# Altium PCB Booster_Sensors.PcbDoc
Units mil, origin at the board's own origin, x right, y up, seen from the top; angles counter-clockwise.
Board outline 12795.28 x 354.33 mil, 2 copper layers (Top Layer, Bottom Layer); 16 components, 10 nets, 28 pads, 27 vias.
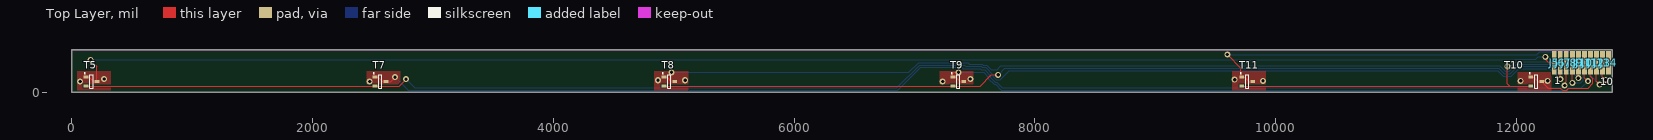
[diagram p0: Top Layer view]
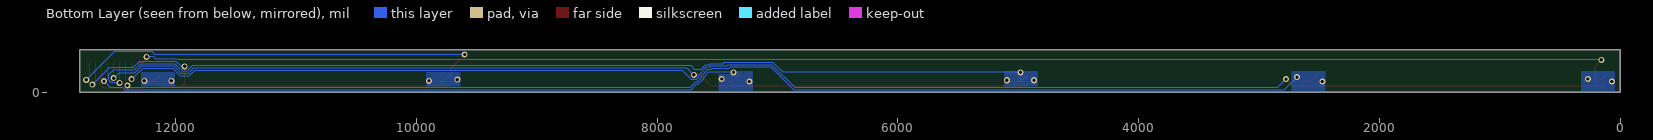
[diagram p1: Bottom Layer view, seen from below]
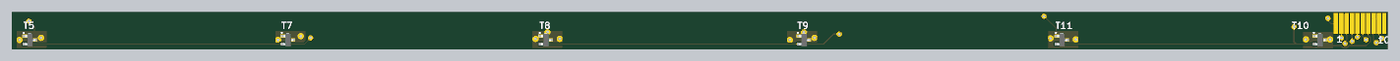
[diagram p2: 3D render of the assembled board from above, using the file's embedded part models]

## Layer stack, top to bottom
Top Solder: solder mask 0.4, Solder Resist, Dk 3.5
Top Layer: signal copper 1.4
Dielectric 1: dielectric 12.6, FR-4, Dk 4.8
Bottom Layer: signal copper 1.4
Bottom Solder: solder mask 0.4, Solder Resist, Dk 3.5

## Board outline
-0.28,0 -0.28,354.33 12795,354.33 12795,0

## Design rules (kind name [scope] priority, off if disabled: settings)
Clearance [All] p1: gap=10 ignorepadtopadclearanceinfootprint=FALSE except(0: Arc-Hole Track-Hole SMDPad-Hole THPad-Hole Via-Hole Fill-Hole Poly-Hole Region-Hole Text-Hole)
PolygonConnect [All] p1: connectstyle=Direct reliefconductorwidth=10 reliefentries=4 polygonreliefangle="90 Angle" airgapwidth=10
RoomDefinition Sensors [InComponentClass('Sensors')] p1: confinementstyle=ConfineIn formatcopy=TRUE lockcomponents=FALSE outline 11930,-45 12780,-45 12780,490 11930,490
RoutingVias [All] p1: holewidth=28 width=50 viastyle="Through Hole" minholewidth=28 minwidth=50 maxholewidth=28 maxwidth=50
SolderMaskExpansion [All] p1: expansion=4
Width [All] p1: maxlimit=10 minlimit=10 preferedwidth=10
30 further rules are at their usual default settings.

## Components (designator, comment, footprint, x,y, rotation, side; value= is the part's Value field where it differs from the comment)
J5 "SMD Pad" R700X200 12315,245 r270 top
J6 "SMD Pad" R700X200 12365,245 r270 top
J7 "SMD Pad" R700X200 12415,245 r270 top
J8 "SMD Pad" R700X200 12465,245 r270 top
J9 "SMD Pad" R700X200 12515,245 r270 top
J10 "SMD Pad" R700X200 12565,245 r270 top
J11 "SMD Pad" R700X200 12615,245 r270 top
J12 "SMD Pad" R700X200 12665,245 r270 top
J13 "SMD Pad" R700X200 12715,245 r270 top
J14 "SMD Pad" R700X200 12765,245 r270 top
T5 "BC847B" SOT95P230X110-3N 164.68,88.98 r0 top
T7 "BC847B" SOT95P230X110-3N 2564.68,88.98 r0 top
T8 "BC847B" SOT95P230X110-3N 4964.69,88.98 r0 top
T9 "BC847B" SOT95P230X110-3N 7364.69,88.98 r0 top
T10 "BC847B" SOT95P230X110-3N 12164.69,88.98 r0 top
T11 "BC847B" SOT95P230X110-3N 9764.69,88.98 r0 top

## Footprints (in the part's own frame and the unit in brackets; to place one, negate y for a bottom-side part, rotate by r counter-clockwise, add the part's x,y. Pads: shape width x height; smd on the part's side, far side on the other; paste and mask are expansions set on the pad)
R700X200 [mm] "7mm x  2mm SMD Pad"
  rect 5x1 smd paste-1: 1(0,0)
SOT95P230X110-3N [mm] "SOT23, 3 pin, Pitch 0.95mm - 1.3mm W X 2.9mm L X 1.1mm H, IPC Medium Density"
  rect 1x0.6 smd: 1(-1.15,0.95) 2(-1.15,-0.95) 3(1.15,0)
  silkscreen extent -1.52,-1.45 0.32,1.87, body extent -1.08,-1.5 1.25,1.5, height 1.1

## Part data
J5 J6 J7 J8 J9 J10 J11 J12 J13 J14: library part SMD_PAD_7X2MM, "Single SMD Pad", Author="CERN DEM MR", ComponentHeight=0mm, Component Type="Standard (No BOM)", CreateDate=09.09.2016, Family="SMD Pad", HelpURL=Undefined, LatestRevisionDate=09.09.2016, Mounted=No, PackageDescription="7mm x  2mm SMD Pad", Part Description="7mm x 2mm SMD Pad", Part Number=SMD_PAD_7X2MM, Pin Count=1, Sense=No, SMD=No, Socket=No, Status=None
T5 T7 T8 T9 T10 T11: "NPN Transistor", Case=SOT23-3, Manufacturer="NXP SEMICONDUCTORS", Author="CERN DEM JLC", Bonding=No, ComponentHeight=1.1mm, Component Type=Standard, CreateDate=14.06.2011, Device=BC847B, HelpURL=\\cern.ch\dfs\Applications\Altium\Datasheets\BC847B.pdf, LatestRevisionDate=14.06.2011, Manufacturer Part Number=BC847B, Mounted=Yes, PackageDescription="SOT23, 3 pin, Pitch 0.95mm - 1.3mm W X 2.9mm L X 1.1mm H, IPC Medium Density", Part Description="45V 100mA NPN general-purpose transistors", Part Number=BC847B, Pin Count=3, PressFit=No, Sense=No, SMD=Yes, Socket=No

## Via types
v1: diameter 50, hole 28, Top Layer to Bottom Layer, 27 vias

## Nets (pads, with @x,y where several pads share a name; then routed paths per layer and width w, separated by ;. In a path a pad name is that pad's centre, name@x,y a point inside that pad or via, vN(x,y) a via of type N, cw(c..) or ccw(c..) an arc to the next point about the centre after c; other vN are vias at no path point)
GND: J14.1
NetJ5_1: J5.1 T5.1 T5.3 | length 12529.6
  Top Layer w10: T5.1 145,126.38 182.4,88.98 T5.3 ; v1(157,269) 210,216 T5.3 ; v1(12240,295) 12240,300 12227.5,287.5 12270,245 J5.1
  Bottom Layer w10: v1(157,269) 11979,269 11985,275 12161,275 12181,295 v1(12240,295)
  other v1: 70,90 270,110
NetJ6_1: J6.1 T5.2 T7.2 | length 12681.7
  Top Layer w10: T5.2 T7.2 2719.57,51.57 v1(2777,109) ; v1(12365,109) J6.1
  Bottom Layer w10: v1(2777,109) 2849.03,36.97 6853.68,36.97 7042.91,226.19 7415,226.19 7426.19,215 7553.28,215 7562.28,206 7590.57,206 7655,141.57 7655,128.43 7678.43,105 7711.57,105 7786.57,180 11846.86,180 11891.86,135 11958.14,135 12018.14,195 12279,195 v1(12365,109)
NetJ7_1: J7.1 T7.1 T7.3 | length 10305.2
  Top Layer w10: T7.1 2545,126.38 2582.4,88.98 T7.3 2648.98,88.98 v1(2686,126) ; v1@12395,69 12415,89 J7.1
  Bottom Layer w10: v1(2686,126) 2795.03,16.97 6861.97,16.97 7051,206 7395,206 7406,195 7545,195 7554,186 7582.28,186 7635,133.28 7635,120.15 7670.15,85 7683.28,85 7731.32,36.97 12380,36.97 v1(12400,56.97)
  other v1: 2475,90
NetJ8_1: J8.1 T8.1 T8.3 | length 8221.9
  Top Layer w10: T8.1 4945,126.38 4982,89.38 ; v1(4982,166) 4982,89.38 ; T8.3 4982.4,88.98 ; v1(12465,78) J8.1 ; 4982,89.38 4982.4,88.98 ; 4982,89.38 4982,88.98 4982.4,88.98
  Bottom Layer w10: v1(4982,166) 6954.43,166 7034.62,246.19 7446,246.19 7457.19,235 7561.57,235 7570.57,226 7598.85,226 7636.85,188 7686.28,188 7718.28,220 11863.43,220 11908.43,175 11941.57,175 12001.57,235 12295.57,235 12345.57,185 12518,185 12555,148 12555,98 12535,78 v1(12465,78)
  other v1: 4870,100 5095,100
NetJ9_1: J9.1 T8.2 T9.2 | length 7869.8
  Top Layer w10: T8.2 T9.2 7546.57,51.57 7640,145 v1(7695,145) ; v1(12515,118) J9.1
  Bottom Layer w10: v1(7695,145) 7695,143.57 7751.43,200 11855.15,200 11900.15,155 11949.85,155 12009.85,215 12287.28,215 12343.28,159 12474,159 v1(12515,118)
NetJ10_1: J10.1 T9.1 T9.3 | length 5680.7
  Top Layer w10: v1(7366,166) 7330.41,166 7319.41,155 T9.1 7345,126.38 7382.4,88.98 T9.3 ; J10.1 12565,122 v1(12595,92)
  Bottom Layer w10: v1(7366,166) 7574,166 7615,125 7615,111.86 7661.86,65 7675,65 7723.03,16.97 12383.43,16.97 12416.57,16.97 12435.6,36 12539,36 v1(12595,92)
  other v1: 7235,90 7465,110
NetJ11_1: J11.1 T10.1 T10.3 | length 763.2
  Top Layer w10: T10.1 12145,126.38 12182.4,88.98 T10.3 12263.94,35 12365.4,35 12383.43,16.97 12416.57,16.97 12434.6,35 12595,35 12635,75 12635,112 12615,132 J11.1
  other v1: 12035,95 12260,95
NetJ12_1: J12.1 T10.2 T11.2 | length 3624.5
  Top Layer w10: T11.2 11943.43,51.57 ; v1(11925,215) 11925,70 11943.43,51.57 ; T10.2 11943.43,51.57 ; J12.1 12665,90 v1(12691,64)
  Bottom Layer w10: v1(11925,215) 11953.28,215 11993.28,255 12303.85,255 12353.85,205 12550,205 v1(12691,64)
NetJ13_1: J13.1 T11.1 T11.3 | length 3748.3
  Top Layer w10: v1(9599,314) 9712,201 9712,126.38 T11.1 9745,126.38 9782.4,88.98 T11.3 ; J13.1 12715,131 v1(12742,104)
  Bottom Layer w10: v1(9599,314) 9600,313 12170.72,313 12192.72,335 12511,335 v1(12742,104)
  other v1: 9895,95 9660,105

## Polygon pours and split planes (outlines as drawn)
NetJ11_1 on Bottom Layer "Signal Layer 1-No Net 1" (solid, pour order 20): 12012,165 12287,165 12287,-5 12007,-5 12007,160
NetJ13_1 on Bottom Layer "Signal Layer 1-No Net 1" (solid, pour order 16): 9642,175 9917,175 9917,5 9912,0 9637,0 9637,170
NetJ10_1 on Bottom Layer "Signal Layer 1-No Net 1" (solid, pour order 12): 7212,175 7487,175 7487,5 7482,0 7207,0 7207,170
NetJ8_1 on Bottom Layer "Signal Layer 1-No Net 1" (solid, pour order 8): 4842,175 5117,175 5117,5 5112,0 4837,0 4837,170
NetJ7_1 on Bottom Layer "Signal Layer 1-No Net 1" (solid, pour order 4): 2455,175 2730,175 2730,5 2725,0 2450,0 2450,170
NetJ5_1 on Bottom Layer "Signal Layer 1-No Net 1" (solid, pour order 0): 50,175 325,175 325,5 320,0 45,0 45,170
NetJ11_1 on Top Layer "Signal Layer 1-No Net 1" (solid, remove dead copper, pour order 22): 12010,165 12290,165 12290,5 12010,5
NetJ13_1 on Top Layer "Signal Layer 1-No Net 1" (solid, remove dead copper, pour order 18): 9640,175 9920,175 9920,15 9640,15
NetJ10_1 on Top Layer "Signal Layer 1-No Net 1" (solid, remove dead copper, pour order 14): 7210,175 7490,175 7490,15 7210,15
NetJ8_1 on Top Layer "Signal Layer 1-No Net 1" (solid, remove dead copper, pour order 10): 4840,175 5120,175 5120,15 4840,15
NetJ7_1 on Top Layer "Signal Layer 1-No Net 1" (solid, remove dead copper, pour order 6): 2450,175 2730,175 2730,15 2450,15
NetJ5_1 on Top Layer "Signal Layer 1-No Net 1" (solid, remove dead copper, pour order 2): 45,175 325,175 325,15 45,15

## Keep-outs
Keep-Out Layer:
  lines w3.94: 12440.67,0 0,0 0,354.33 12440.67,354.33

## Silkscreen, mask and mechanical layers (free items; w line width, h text height)
Top Overlay:
  text "1" at 12312.99,67.76 h60
  text "10" at 12695,60 h60
Mechanical 1:
  the board outline again, w3.94